# EAGLE board Skull (EAGLE 5.11)
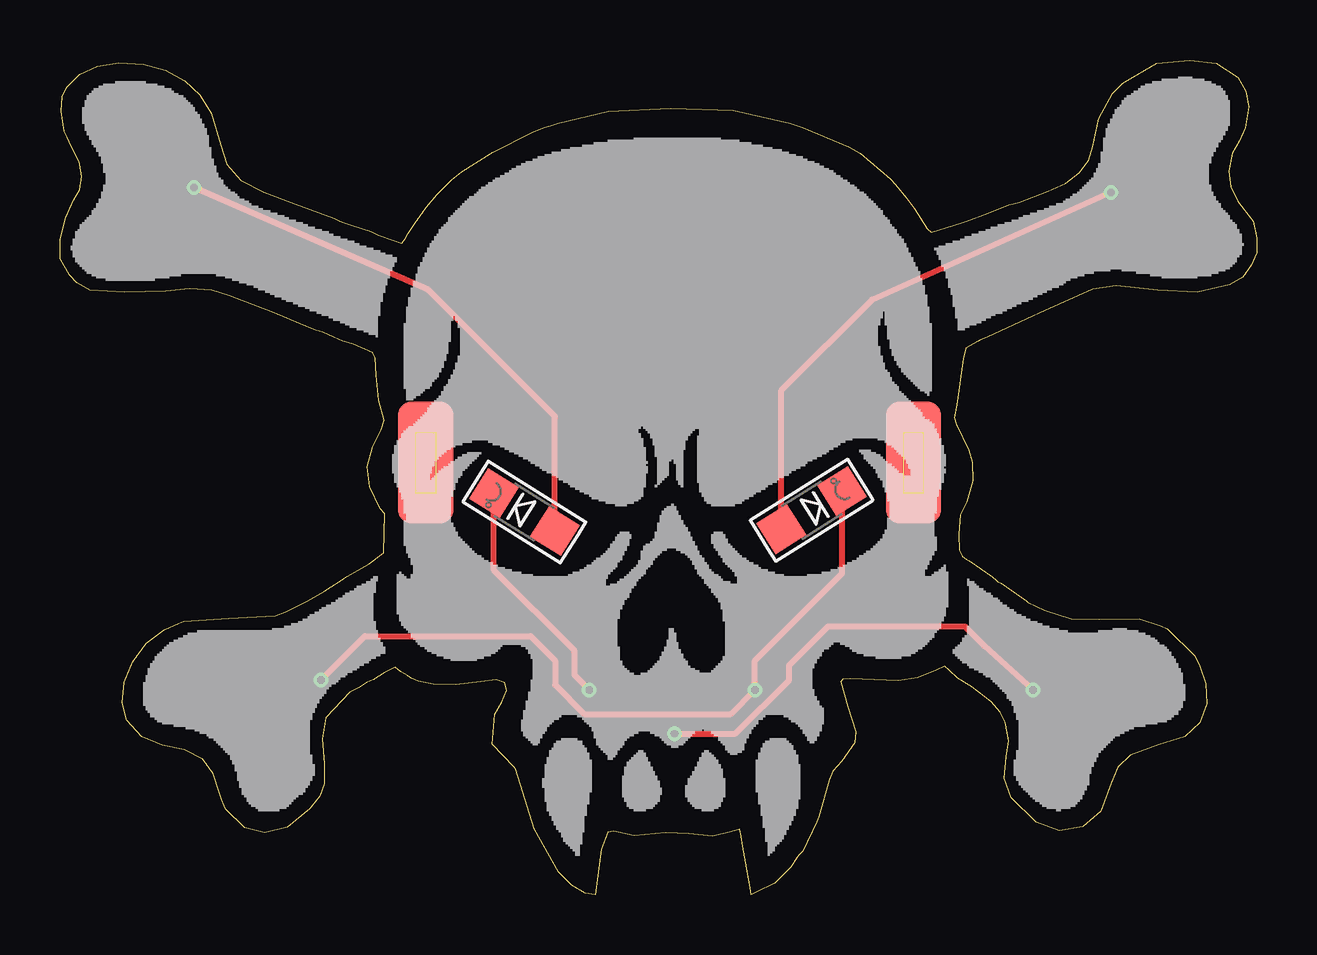
[diagram p0: board, top side]
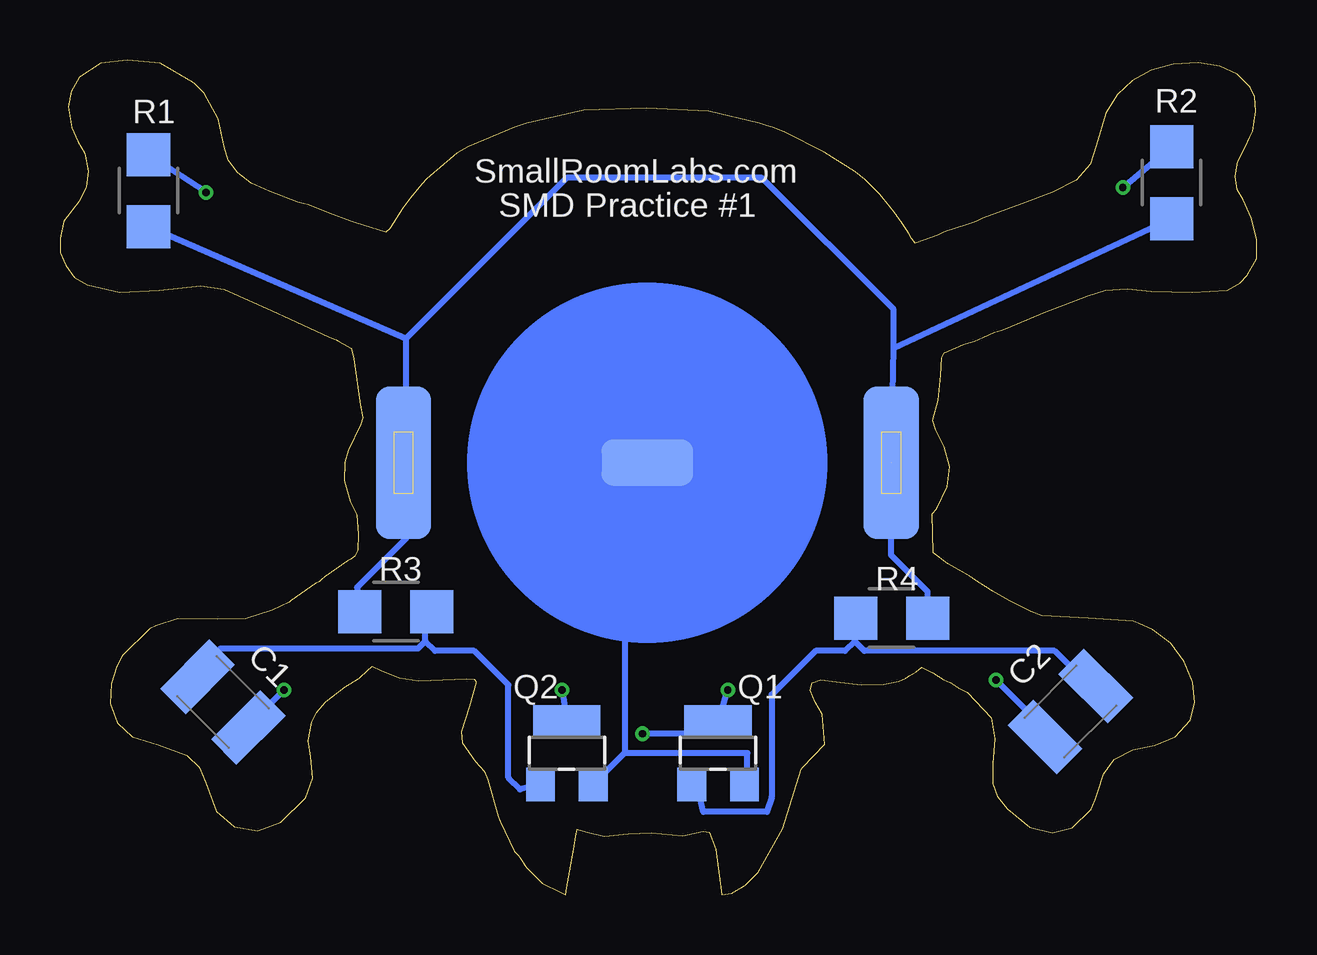
[diagram p1: board, bottom side, seen from below]

Size 49.87 x 34.78 mm. Coordinates in mm from the lower left corner, seen from the top.
Outline: 21.88,0.06 21.32,0.39 20.78,0.94 19.77,2.75 18.98,5.22 18.93,5.31 18.01,6.27 18.12,7.51 18.4,8.02 18.62,8.51 18.54,8.83 18.18,8.95 17.54,8.88 16.48,8.74 15.54,8.78 14.93,8.89 14.64,9.02 14.5,9.11 14.2,9.29 13.96,9.47 13.52,9.24 13.05,8.96 12.94,8.91 12.77,8.83 12.44,8.62 12.08,8.43 11.07,7.37 10.92,6.5 11,5.45 11.02,4.63 10.82,4.09 10.41,3.58 9.47,2.82 8.54,2.57 7.69,2.79 6.9,3.55 6.84,3.7 6.74,3.95 6.64,4.27 6.39,5.04 5.95,5.64 5.19,6.03 4.27,6.23 3.4,6.59 2.78,7.27 2.59,8 2.68,8.85 3.02,9.71 3.6,10.47 4.34,11.04 4.96,11.31 5.16,11.4 7.02,11.52 8.97,11.62 9.4,11.78 10.32,12.26 11.01,12.65 11.3,12.84 11.69,13.08 11.84,13.18 11.96,13.27 12.41,13.51 12.88,13.78 13.49,14.26 13.53,15.86 13.34,16.09 12.92,17.01 12.8,17.83 13.04,18.66 13.39,19.38 13.52,19.77 13.29,20.61 13.18,21.65 13.14,22.38 13.02,22.59 12.23,22.93 12.01,22.99 11.79,23.05 11.41,23.22 10.95,23.43 10.66,23.52 10.38,23.61 9.44,24.02 8.91,24.24 7.33,24.86 7.06,24.95 6.32,25.19 5.4,25.24 4.4,25.14 2.7,25.1 1.23,25.18 0.7,25.5 0.4,25.8 0,26.5 0,27.3 0.25,28.21 0.58,28.95 0.82,29.36 0.9,29.93 0.81,30.54 0.48,31.18 0.3,31.55 0.18,31.8 0.06,32.63 0.09,33.26 0.29,33.64 0.82,34.18 1.55,34.52 2.46,34.66 3.5,34.6 4.41,34.35 5.19,33.92 5.83,33.32 6.3,32.57 6.71,31.22 6.95,30.43 7.53,29.76 8.51,29.26 9.77,28.79 11.42,28.19 11.68,28.06 11.84,27.99 12.15,27.89 12.49,27.79 12.67,27.73 12.88,27.66 13.04,27.6 13.29,27.47 13.89,27.27 14.24,27.14 14.38,27.33 14.51,27.56 14.81,27.99 15.11,28.43 15.27,28.65 15.72,29.19 16.31,29.78 16.74,30.12 18.03,30.94 19.68,31.76 20.13,31.95 20.49,32.06 20.74,32.15 22.85,32.65 25.45,32.77 28.05,32.68 30.42,32.14 30.92,31.97 32.86,31.17 33.35,30.9 34.59,29.83 34.79,29.6 35.27,29.01 35.59,28.59 36.14,27.74 36.3,27.59 37.24,27.9 37.58,27.99 37.77,28.05 38.66,28.4 39.52,28.74 39.73,28.79 39.97,28.86 41.17,29.31 41.91,29.64 42.48,30.08 42.86,30.59 43.02,31.17 43.28,32.33 43.87,33.38 44.25,33.8 44.34,33.86 45.7,34.63 47.07,34.78 48.17,34.64 49.07,34.06 49.41,33.47 49.54,32.83 49.39,31.95 49.13,31.4 48.84,30.9 48.71,30.15 48.78,29.5 49.08,28.9 49.71,28.06 49.87,27.35 49.88,26.76 49.64,26.23 49.28,25.73 48.74,25.42 47.38,25.09 45.74,25.18 44,25.37 43.03,25.23 41.03,24.32 40.3,23.99 38.64,23.22 38.36,23.12 38.26,23.06 38.08,22.96 37.74,22.78 37.63,22.33 37.36,20.41 37.27,19.86 37.34,19.61 37.87,18.52 38.01,18.02 38.03,17.24 37.79,16.38 37.51,15.84 37.45,15.01 37.48,14.34 37.59,14.11 37.76,13.98 37.88,13.91 38.85,13.24 39,13.12 39.07,13.05 39.22,12.98 40.27,12.25 40.33,12.19 41.03,11.84 42.13,11.5 43.3,11.49 44.98,11.49 45.87,11.21 46.12,11.08 47.28,9.95 47.5,9.53 47.73,8.78 47.78,7.95 47.49,7.17 46.87,6.58 45.77,6.24 44.59,5.81 44.07,5.31 43.79,4.67 43.36,3.49 42.61,2.83 41.63,2.66 40.67,3.02 39.63,4.04 39.35,4.85 39.43,5.74 39.52,6.42 39.39,7.18 39.19,7.61 38.8,8.04 37.98,8.66 37.41,9.01 37.04,9.35 36.85,9.53 36.51,9.36 35.73,9.04 34.93,8.92 32.92,8.99 32.61,8.98 32.54,8.86 32.83,7.83 33.16,6.79 33.12,6.32 32.58,5.56 32.19,5.13 32.05,4.79 31.6,3.26 31.52,3.04 30.95,1.82 30.79,1.64 30.72,1.56 30.46,1.14 29.78,0.48 29.01,0.1 28.8,0 28.77,0.29 28.45,2.02 28.39,2.44 28.32,2.73 27.97,2.62 27.19,2.44 26.2,2.54 25.23,2.57 23.92,2.45 23.06,2.65 22.82,2.6 22.56,1.9 22.41,0.78 22.3,0 21.88,0.06 21.88,0.06
Copper layers (1*16): Top 0.035mm / dielectric 1.5mm / Bottom 0.035mm
Design rules "SmartPrototyping": minimum track width 7mil, minimum drill 12mil, track to track 7mil, track to pad 7mil, pad to pad 7mil, via to via 7mil, smd to smd 0mil, copper to edge 20mil, drill to drill 10mil, minimum pad ring 10mil, minimum via ring 6mil, stop-mask expansion 2mil, vias tented up to drill 25mil, thermal gap 10mil
Net classes: 0 default: width 0.254 mm, drill 0.305 mm, clearance 0.254 mm

## Footprints (pad centres in the part's own frame; a part is rotated, then mirrored left to right if it is on the bottom)
C1210K = smd 1.5 x 2.9: 1 -1.5,0; 2 1.5,0
CHIPLED_1206 = smd 1.5 x 1.5: A 0,-1.496; C 0,1.496
SOT23-W = smd 1.2 x 1.4: 1 -1.1,-1.3; 2 1.1,-1.3 | smd 2.8 x 1.4: 3 0,1.3
R1210W = smd 1.8 x 1.8: 1 -1.499,0; 2 1.499,0
CR2032-PTH-CHEAP = smd 3.81 x 1.905: NEG 0,0 | smd 2.3 x 5.08 bottom: POS@1 -10.16,0; POS@4 10.16,0 | smd 2.3 x 6.35: POS@2 -10.16,0; POS@3 10.16,0

## Placement (x,y rotation side)
C1  4u7  [C1210K]  43.09,8.02 315 bottom
C2  4u7  [C1210K]  7.78,7.63 45 bottom
D1  [CHIPLED_1206]  31.32,16.02 302 top
D2  [CHIPLED_1206]  19.35,15.95 58 top
Q1  [SOT23-W]  22.46,5.89 0 bottom
Q2  [SOT23-W]  28.75,5.89 0 bottom
R1  270R  [R1210W]  46.19,29.34 90 bottom
R2  270R  [R1210W]  3.56,29.67 90 bottom
R3  2M2  [R1210W]  35.88,11.79 0 bottom
R4  2M2  [R1210W]  15.22,11.52 180 bottom
U$1  BATTERY-NOBOTSTOP  [CR2032-PTH-CHEAP]  25.4,18 180 bottom

## Library data of the parts
C1 C2 R1-R4 = rcl
D1 D2 Q1 Q2 = microbuilder
U$1 = SmallRoomLabs

## Nets
GND: Q1.2 Q2.2 U$1.NEG
N$1: D2.A R2.2
N$2: D1.A R1.2
N$3: C1.1 Q2.1 R3.2
N$4: C2.2 Q1.1 R4.2
N$9: C1.2 D2.C Q1.3
N$10: C2.1 D1.C Q2.3
POS2: U$1.POS@3
VCC: R1.1 R2.1 R3.1 R4.1 U$1.POS@1

## Tracks (layer width: path | path; a pad name or v marks a point on that pad's centre or on a via)
GND
  Bottom 0.254: Q1.2 21.24,4.39 21.24,5.89 26.35,5.89 | 25.3,18 U$1.NEG 26.32,17.08 26.32,5.93 26.35,5.89 | 26.35,5.89 Q2.2
N$1  (via drill 0.3)
  Top 0.254: D2.A 20.62,19.92 15.34,25.2 v5.59,29.46
  Bottom 0.254: v5.59,29.46 R2.2
N$2  (via drill 0.3)
  Top 0.254: D1.A 30.05,21.01 33.83,24.79 v43.79,29.26
  Bottom 0.254: v43.79,29.26 R1.2
N$3
  Bottom 0.254: C1.1 43.18,10.25 34.96,10.25 34.65,10.57 | 34.65,10.57 34.65,11.53 R3.2 | Q2.1 30.71,4.39 31.19,4.88 31.19,8.74 32.62,10.16 34.24,10.16 34.65,10.57
N$4
  Bottom 0.254: C2.2 6.96,8.69 8.43,10.16 16.36,10.16 16.77,10.57 | 16.77,10.57 16.77,11.27 R4.2 | 23.35,4.15 Q1.1 23.27,4.31 23.06,3.45 20.42,3.45 20.22,4.06 20.22,8.33 18.39,10.16 17.17,10.16 16.77,10.57
N$9  (via drill 0.3)
  Top 0.254: v40.54,8.53 38.51,10.36 37.7,11.18 32.01,11.18 30.38,9.55 30.38,8.94 28.14,6.71 v25.6,6.71 | D2.C 18.08,13.52 21.44,10.16 21.44,9.14 v22.05,8.53
  Bottom 0.254: v22.05,8.53 Q1.3 22.54,6.71 v25.6,6.71 | C1.2 42.03,7.05 v40.54,8.53
N$10  (via drill 0.3)
  Top 0.254: v10.87,8.94 12.7,10.77 19.61,10.77 20.63,9.75 20.63,8.74 21.85,7.52 27.94,7.52 v28.96,8.53 28.96,9.75 32.59,13.39 D1.C
  Bottom 0.254: v28.96,8.53 Q2.3 | C2.1 8.84,6.91 v10.87,8.94
VCC  (1 unrouted)
  Bottom 0.254: 15.14,22.76 R2.1 | 15.14,22.76 U$1.POS@1 15.24,14.15 13.72,12.63 R4.1 | 35.46,23.16 R1.1 | 15.14,22.76 15.14,24.38 20.63,29.87 28.75,29.87 35.46,23.16 | 35.46,23.16 35.46,14.83 37.49,12.8 37.49,11.68 R3.1

## Text on the board
bPlace: SmallRoomLabs.com | SMD Practice #1